# Altium PCB main.PcbDoc
Units mil, origin at the board's own origin, x right, y up, seen from the top; angles counter-clockwise.
Board outline 6000 x 4000 mil, 2 copper layers (Top Layer, Bottom Layer); 69 components, 52 nets, 285 pads, 20 vias.
Unrouted connection lines stored in the file: 158.
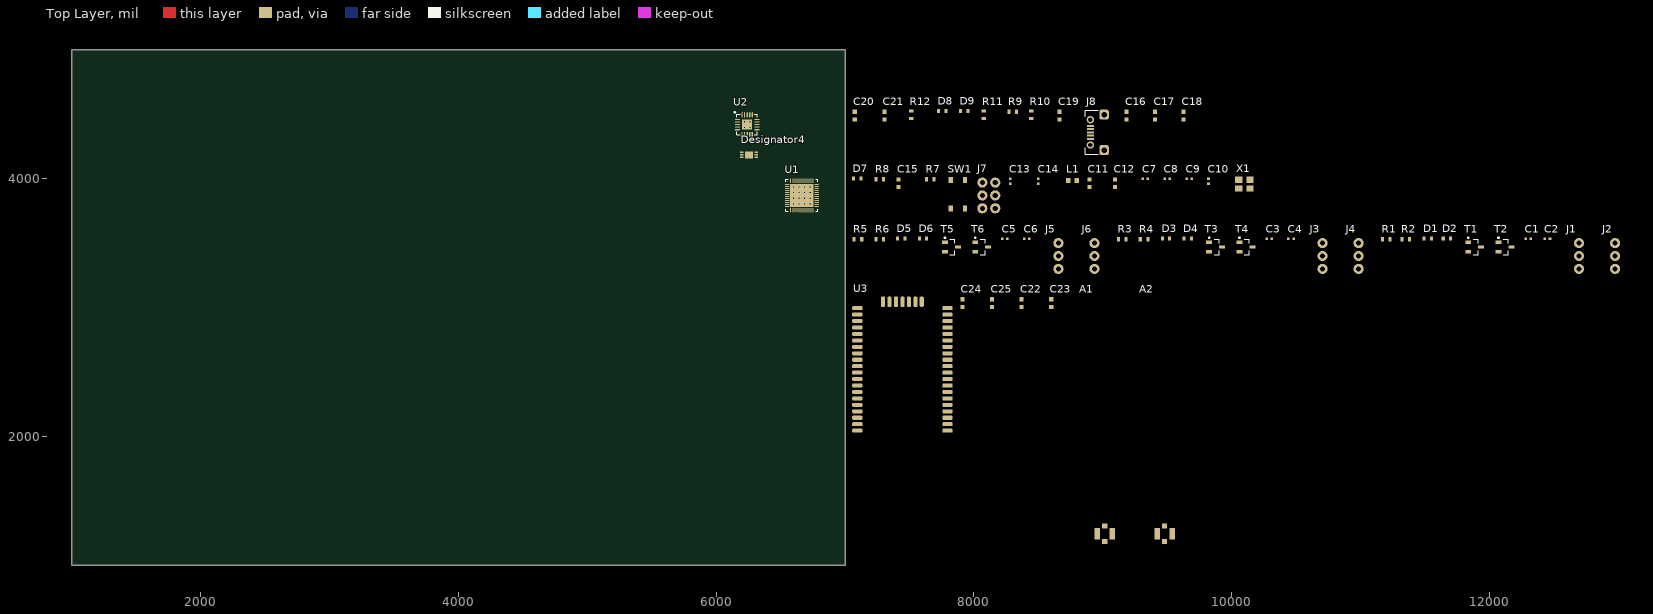
[diagram p0: Top Layer view]
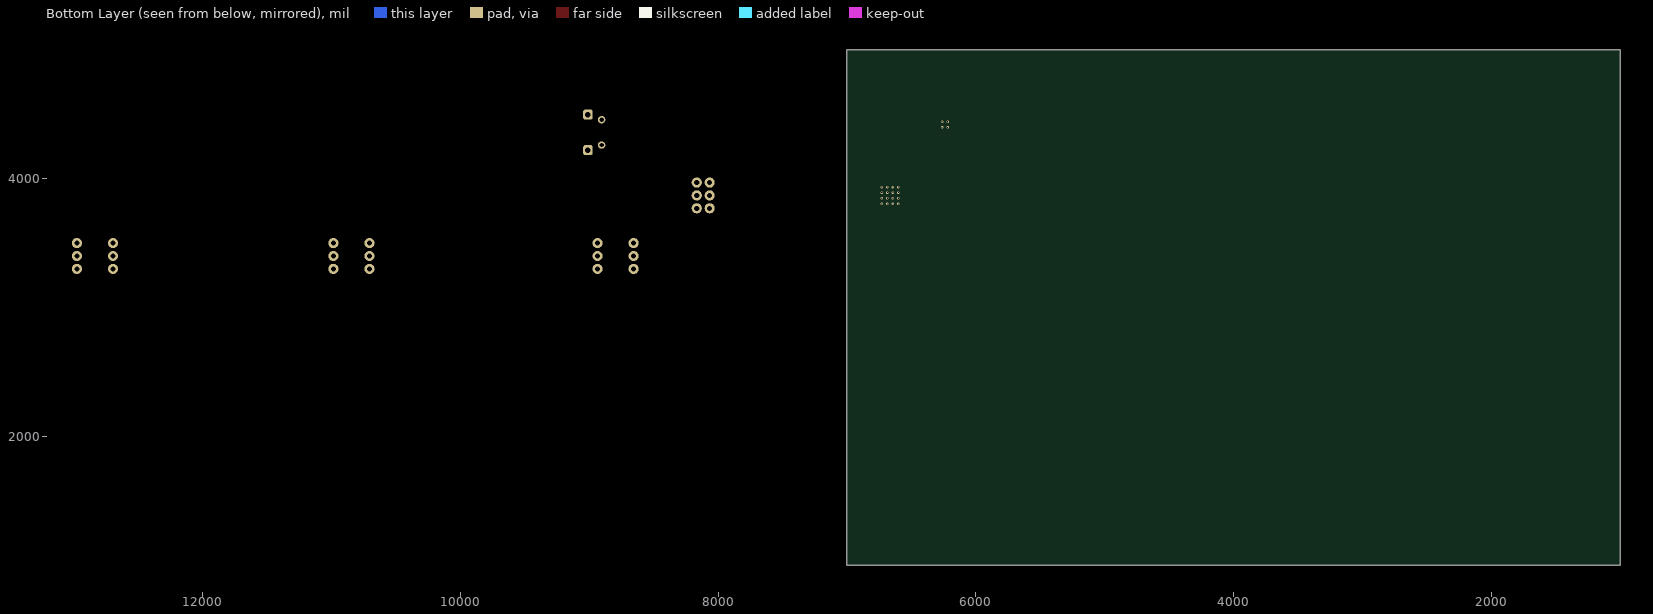
[diagram p1: Bottom Layer view, seen from below]

## Layer stack, top to bottom
Top Solder: solder mask 0.4, Solder Resist, Dk 3.5
Top Layer: signal copper 1.4
Dielectric 1: dielectric 12.6, FR-4, Dk 4.8
Bottom Layer: signal copper 1.4
Bottom Solder: solder mask 0.4, Solder Resist, Dk 3.5

## Board outline
1000,1000 7000,1000 7000,5000 1000,5000

## Design rules (kind name [scope] priority, off if disabled: settings)
Clearance [All] p1: gap=6.3 ignorepadtopadclearanceinfootprint=FALSE except(0: Arc-Text Arc-Hole Track-Text Track-Hole SMDPad-Text SMDPad-Hole THPad-Text THPad-Hole Via-Text Via-Hole Fill-Text Fill-Hole Poly-Text Poly-Hole Region-Text Region-Hole Text-Text Text-Hole)
Height [All] p1: minheight=0 maxheight=7874.02 prefheight=500
HoleSize [All] p1: absolutevalues=TRUE maxlimit=250 minlimit=11.81 maxpercent=80.000 minpercent=20.000
MinimumSolderMaskSliver [All] p1: minsoldermaskwidth=3.94
PlaneClearance [All] p1: clearance=39.37
PlaneConnect [All] p1: planeconnectstyle=Relief reliefexpansion=20 reliefentries=4 reliefconductorwidth=39.37 reliefairgap=10
PolygonConnect PolygonConnect_1 [IsVia] p1: connectstyle=Direct reliefconductorwidth=10 reliefentries=4 polygonreliefangle="90 Angle" airgapwidth=10
PolygonConnect [All] p2: connectstyle=Relief reliefconductorwidth=7.87 reliefentries=4 polygonreliefangle="90 Angle" airgapwidth=7.87
RoutingVias [All] p1: holewidth=11.81 width=23.62 viastyle="Through Hole" minholewidth=11.81 minwidth=23.62 maxholewidth=250 maxwidth=393.7
SilkToSolderMaskClearance [IsPad] p1: minsilkscreentomaskgap=7.01 clearancetoexposedcopper=TRUE
SolderMaskExpansion [All] p1: expansion=4
Width [All] p1: maxlimit=393.7 minlimit=6.3 preferedwidth=15.75
24 further rules are at their usual default settings.

## Classes and differential pairs
component class "USB HOST": C16 C17 C18 C19 C20 C21 D8 D9 J8 R9 R10 R11 R12 U2
component class "Target MCU": C7 C8 C9 C10 C11 C12 C13 C14 C15 D7 J7 L1 R7 R8 SW1 U1 X1
component class Sensors: C1 C2 C3 C4 C5 C6 D1 D2 D3 D4 D5 D6 J1 J2 J3 J4 J5 J6 R1 R2 R3 R4 R5 R6 T1 T2 T3 T4 T5 T6
component class LoRaWan: A1 A2 C22 C23 C24 C25 U3

## Components (designator, comment, footprint, x,y, rotation, side; value= is the part's Value field where it differs from the comment)
A1 "Antenna" "uFL SMD" 9015,1245 r0 top
A2 "Antenna" "uFL SMD" 9480,1245 r0 top
C1 "Capacitor 0402" C0402 12300,3535 r0 top value=100nF
C2 "Capacitor 0402" C0402 12450,3535 r0 top value=100nF
C3 "Capacitor 0402" C0402 10290,3535 r0 top value=100nF
C4 "Capacitor 0402" C0402 10460,3535 r0 top value=100nF
C5 "Capacitor 0402" C0402 8240,3535 r0 top value=100nF
C6 "Capacitor 0402" C0402 8410,3535 r0 top value=100nF
C7 "Capacitor 0402" C0402 9330,4000 r0 top value=100nF
C8 "Capacitor 0402" C0402 9500,4000 r0 top value=100nF
C9 "Capacitor 0402" C0402 9670,4000 r0 top value=100nF
C10 "Capacitor 0402" C0402 9820,3980 r90 top value=100nF
C11 "Capacitor 0603" C0603 8895,3965 r90 top value=100nF
C12 "Capacitor 0603" C0603 9095,3965 r90 top value=100nF
C13 "Capacitor 0402" C0402 8280,3980 r90 top value=100nF
C14 "Capacitor 0402" C0402 8500,3980 r90 top value=100pF
C15 "Capacitor 0603" C0603 7415,3965 r90 top value=100nF
C16 "Capacitor 0603" C0603 9185,4490 r90 top value=100nF
C17 "Capacitor 0603" C0603 9405,4490 r90 top value=100nF
C18 "Capacitor 0603" C0603 9625,4490 r90 top value=100nF
C19 "Capacitor 0603" C0603 8665,4490 r90 top value=100nF
C20 "Capacitor 0603" C0603 7075,4490 r90 top value=100nF
C21 "Capacitor 0603" C0603 7305,4490 r90 top value=100nF
C22 "Capacitor 0603" C0603 8370,3035 r90 top value=100nF
C23 "Capacitor 0603" C0603 8600,3035 r90 top value=100nF
C24 "Capacitor 0603" C0603 7910,3035 r90 top value=100nF
C25 "Capacitor 0603" C0603 8140,3035 r90 top value=100nF
D1 "LED Red" "L0603 RED" 11520,3535 r0 top
D2 "LED Red" "L0603 RED" 11670,3535 r0 top
D3 "LED Red" "L0603 RED" 9490,3535 r0 top
D4 "LED Red" "L0603 RED" 9660,3535 r0 top
D5 "LED Red" "L0603 RED" 7435,3535 r0 top
D6 "LED Red" "L0603 RED" 7605,3535 r0 top
D7 "LED Blue" "L0603 BLUE" 7095,4000 r0 top
D8 "LED Green" "L0603 GREEN" 7755,4525 r0 top
D9 "LED Green" "L0603 GREEN" 7925,4525 r0 top
Designator4 "Comment" "DFN 6-pins" 6255,4185 r90 top
J1 "Header 1x3" "Header 1x3 Male" 12695,3300 r0 top
J2 "Header 1x3" "Header 1x3 Male" 12975,3300 r0 top
J3 "Header 1x3" "Header 1x3 Male" 10705,3300 r0 top
J4 "Header 1x3" "Header 1x3 Male" 10985,3300 r0 top
J5 "Header 1x3" "Header 1x3 Male" 8655,3300 r0 top
J6 "Header 1x3" "Header 1x3 Male" 8935,3300 r0 top
J7 "Header 2x3" "Header 2x3 Male" 8065,3770 r0 top
J8 "USB micro" "USB micro" 8990,4360 r90 top
L1 "Inductor 0603" "Inductor 0603" 8765,3985 r0 top value=10mH
R1 "Resistor 0603" R0603 11200,3530 r0 top value=1k
R2 "Resistor 0603" R0603 11350,3530 r0 top value=1k
R3 "Resistor 0603" R0603 9150,3530 r0 top value=1k
R4 "Resistor 0603" R0603 9320,3530 r0 top value=1k
R5 "Resistor 0603" R0603 7100,3530 r0 top value=1k
R6 "Resistor 0603" R0603 7270,3530 r0 top value=1k
R7 "Resistor 0603" R0603 7660,3995 r0 top value=1k
R8 "Resistor 0603" R0603 7270,3995 r0 top value=1k
R9 "Resistor 0603" R0603 8300,4520 r0 top value=1k
R10 "Resistor 0603" R0603 8445,4495 r90 top value=1k
R11 "Resistor 0603" R0603 8075,4495 r90 top value=1k
R12 "Resistor 0603" R0603 7515,4495 r90 top value=1k
SW1 "Button" "Button SMD" 7875,3880 r0 top
T1 "N-CHANNEL MOSFET" 2N7002 11885,3470 r0 top
T2 "N-CHANNEL MOSFET" 2N7002 12120,3470 r0 top
T3 "N-CHANNEL MOSFET" 2N7002 9875,3470 r0 top
T4 "N-CHANNEL MOSFET" 2N7002 10110,3470 r0 top
T5 "N-CHANNEL MOSFET" 2N7002 7825,3470 r0 top
T6 "N-CHANNEL MOSFET" 2N7002 8060,3470 r0 top
U1 "ATmega4809" ATmega4809 6665,3870 r0 top
U2 "FT231" FTDI 6240,4420 r0 top
U3 "Wifi module" RN2483A 7095,2045 r0 top
X1 "Oscillator" "Crystal SMD 3.2x2.5" 10055,3925 r0 top

## Footprints (in the part's own frame and the unit in brackets; to place one, negate y for a bottom-side part, rotate by r counter-clockwise, add the part's x,y. Pads: shape width x height; smd on the part's side, far side on the other; paste and mask are expansions set on the pad)
2N7002 [mm] "N-CHANNEL MOSFET"
  rect 1.15x0.65 smd: 1(-1.275,0.95) 2(-1.275,-0.95) 3(1.275,0)
  silkscreen extent -1.4,-1.5 0.7,1.95, body extent -1.25,-1.5 1.25,1.5, height 1.2
ATmega4809 [mm] "QFN, 48-Leads, Body 6.00x6.00mm, Pitch 0.40mm, Thermal Pad 4.60x4.60mm, IPC Medium Density"
  oval 0.85x0.2 smd: 1(-2.9,2.2) 2(-2.9,1.8) 3(-2.9,1.4) 4(-2.9,1) 5(-2.9,0.6) 6(-2.9,0.2) 7(-2.9,-0.2) 8(-2.9,-0.6) 9(-2.9,-1) 10(-2.9,-1.4) 11(-2.9,-1.8) 12(-2.9,-2.2) 25(2.9,-2.2) 26(2.9,-1.8) 27(2.9,-1.4) 28(2.9,-1) 29(2.9,-0.6) 30(2.9,-0.2) 31(2.9,0.2) 32(2.9,0.6) 33(2.9,1) 34(2.9,1.4) 35(2.9,1.8) 36(2.9,2.2)
  oval 0.2x0.85 smd: 13(-2.2,-2.9) 14(-1.8,-2.9) 15(-1.4,-2.9) 16(-1,-2.9) 17(-0.6,-2.9) 18(-0.2,-2.9) 19(0.2,-2.9) 20(0.6,-2.9) 21(1,-2.9) 22(1.4,-2.9) 23(1.8,-2.9) 24(2.2,-2.9) 37(2.2,2.9) 38(1.8,2.9) 39(1.4,2.9) 40(1,2.9) 41(0.6,2.9) 42(0.2,2.9) 43(-0.2,2.9) 44(-0.6,2.9) 45(-1,2.9) 46(-1.4,2.9) 47(-1.8,2.9) 48(-2.2,2.9)
  rect 4.6x4.6 smd: 49(0,0)
  silkscreen extent -3.15,-3.15 3.15,3.15, body extent -3,-3 3,3, height 0.6
"Button SMD" [mm]
  rect 0.8x1.2 smd: 1(-1.4,2.794) 2(-1.4,-2.794) 3(1.4,2.794) 4(1.4,-2.794)
  body extent -2.29,-3.06 2.29,3.05, height 1.5
C0402 [mm]
  rect 0.5x0.5 smd: 1(-0.5,0) 2(0.5,0)
  body extent -0.5,-0.25 0.5,0.25, height 0.5
C0603 [mm]
  rect 0.8x0.8 smd: 1(-0.75,0) 2(0.75,0)
  body extent -0.8,-0.4 0.8,0.4, height 0.8
"Crystal SMD 3.2x2.5" [mm]
  rect 1.4x1.2 smd: 1(0,0) 2(2.2,0) 3(2.2,1.7) 4(0,1.7)
  body extent -0.5,-0.4 2.7,2.1, height 0.82
"DFN 6-pins" [mm]
  rect 0.25x0.7 smd: ""(-0.5,1.425) ""(-0.5,-1.425) ""(0,1.425) ""(0,-1.425) ""(0.5,1.425) ""(0.5,-1.425)
  rect 1.35x1.65 smd: ""(0,0)
  body extent -1.01,-1.49 0.99,1.51, height 0.8
FTDI [mm] "FT231XQ-R"
  oval 1x0.25 smd: 1(-1.925,1) 2(-1.925,0.5) 3(-1.925,0) 4(-1.925,-0.5) 5(-1.925,-1) 11(1.925,-1) 12(1.925,-0.5) 13(1.925,0) 14(1.925,0.5) 15(1.925,1)
  oval 0.25x1 smd: 6(-1,-1.925) 7(-0.5,-1.925) 8(0,-1.925) 9(0.5,-1.925) 10(1,-1.925) 16(1,1.925) 17(0.5,1.925) 18(0,1.925) 19(-0.5,1.925) 20(-1,1.925)
  rect 1.98x1.98 smd: 21(0,0)
  silkscreen extent -2.54,-2 2,2.54, body extent -2,-2 2,2, height 0.8
"Header 1x3 Male" [mm]
  round 2 hole 1: 1(0,0) 2(0,2.54) 3(0,5.08)
  body extent -2.79,-1.27 3.05,6.35, height 11.7
"Header 2x3 Male" [mm]
  round 2 hole 1: 1(0,0) 2(2.54,0) 3(0,2.54) 4(2.54,2.54) 5(0,5.08) 6(2.54,5.08)
  body extent -1.27,-1.27 3.81,6.35, height 8.38
"Inductor 0603" [mm]
  rect 0.88x0.99 smd: 1(-0.815,0) 2(0.815,0)
  body extent -0.87,-0.48 0.87,0.48, height 0.91
"L0603 BLUE" [mm]
  rect 0.6x0.8 smd: 1(-0.725,0) 2(0.725,0)
  body extent -0.8,-0.4 0.8,0.4, height 0.6
"L0603 GREEN" [mm]
  rect 0.6x0.8 smd: 1(-0.725,0) 2(0.725,0)
  body extent -0.8,-0.4 0.8,0.4, height 0.6
"L0603 RED" [mm]
  rect 0.6x0.8 smd: 1(-0.725,0) 2(0.725,0)
  body extent -0.8,-0.4 0.8,0.4, height 0.6
R0603 [mm]
  rect 0.6x0.9 smd: 1(-0.75,0) 2(0.75,0)
  body extent -0.8,-0.45 0.8,0.45, height 0.5
RN2483A [mm] "RN2483A"
  rrect50% 2x0.8 smd: 1(17.78,0) 2(17.78,1.27) 3(17.78,2.54) 4(17.78,3.81) 5(17.78,5.08) 6(17.78,6.35) 7(17.78,7.62) 8(17.78,8.89) 9(17.78,10.16) 10(17.78,11.43) 11(17.78,12.7) 12(17.78,13.97) 13(17.78,15.24) 14(17.78,16.51) 15(17.78,17.78) 16(17.78,19.05) 17(17.78,20.32) 18(17.78,21.59) 19(17.78,22.86) 20(17.78,24.13) 28(0,24.13) 29(0,22.86) 30(0,21.59) 31(0,20.32) 32(0,19.05) 33(0,17.78) 34(0,16.51) 35(0,15.24) 36(0,13.97) 37(0,12.7) 38(0,11.43) 39(0,10.16) 40(0,8.89) 41(0,7.62) 42(0,6.35) 43(0,5.08) 44(0,3.81) 45(0,2.54) 46(0,1.27) 47(0,0)
  rrect50% 0.8x2 smd: 21(12.7,25.4) 22(11.43,25.4) 23(10.16,25.4) 24(8.89,25.4) 25(7.62,25.4) 26(6.35,25.4) 27(5.08,25.4)
  body extent -0.02,-1.27 17.78,25.4, height 3.01
"uFL SMD" [mm] "Antenna connector"
  rect 1x1 smd: 1(0,-1.5) 2(0,1.5)
  rect 1.05x2.2 smd: 2(-1.475,0) 2(1.475,0)
  body extent -5.25,-4.61 5.25,46.75, height 20
"USB micro" [mm]
  rrect50% 2x1.9 hole 1.1 unplated: 0(-3.517,-0.5) 0(3.483,-0.5)
  round 1.45 hole 0.85 unplated: 0(-2.517,2.2) 0(2.483,2.2)
  rect 0.4x1.35 smd: 1(-1.317,2.2) 2(-0.667,2.2) 3(-0.017,2.2) 4(0.633,2.2) 5(1.283,2.2)
  silkscreen extent -4.32,0.63 4.32,3.18, body extent -4.1,-3.03 4.1,2.4, height 0.23

## Part data
A1 A2: library part "uFL SMD"
D1 D2 D3 D4 D5 D6: library part "LED 0603 Red"
D7: library part "LED 0603 Blue"
D8 D9: library part "LED 0603 Green"
J1 J2 J3 J4 J5 J6: library part "Header 1x3 Male"
J7: library part "Header  2x3 Male"
SW1: library part "Button SMD"
T1 T2 T3 T4 T5 T6: library part 2N7002
U2: library part FTDI, "USB to UART"
U3: library part "LoRaWan module", "RN2483A"
X1: library part "Oscillator 3.2x2.5mm"

## Via types
v1: diameter 19.68, hole 7.87, Top Layer to Bottom Layer, 20 vias

## Nets (pads, with @x,y where several pads share a name; then routed paths per layer and width w, separated by ;. In a path a pad name is that pad's centre, name@x,y a point inside that pad or via, vN(x,y) a via of type N, cw(c..) or ccw(c..) an arc to the next point about the centre after c; other vN are vias at no path point)
+3V3: C7.2 C8.2 C9.2 C10.2 C11.2 J1.1 J2.1 J3.1 J4.1 J5.1 J6.1 J7.6 L1.1 U1.14 U1.42 X1.4
ADC_SENSOR1: C1.2 J1.2 U1.20
ADC_SENSOR2: C2.2 J2.2 U1.21
ADC_SENSOR3: C3.2 J3.2 U1.22
ADC_SENSOR4: C4.2 J4.2 U1.23
ADC_SENSOR5: C5.2 J5.2 U1.24
ADC_SENSOR6: C6.2 J6.2 U1.25
BUTTON: R7.1 U1.46
GND: A1.2 A2.2 C1.1 C2.1 C3.1 C4.1 C5.1 C6.1 C7.1 C8.1 C9.1 C10.1 C11.1 C12.1 C13.1 C14.1 C15.1 C16.1 C17.1 C18.1 C19.1 C20.1 C21.1 C22.1 C23.1 C24.1 C25.1 D7.2 J7.2 R1.1 R2.1 R3.1 R4.1 R5.1 R6.1 SW1.3 SW1.4 T1.2 T2.2 T3.2 T4.2 T5.2 T6.2 U1.15 U1.29 U1.43 U2.3 U2.13 U3.1 U3.8 U3.11 U3.20 U3.21 U3.22 U3.24 U3.26 U3.27 U3.28 U3.33 U3.41 U3.47 X1.2
LED: R8.1 U1.47
NetA1_1: A1.1 U3.25
NetA2_1: A2.1 U3.23
NetC13_2: C13.2 C14.2 L1.2 U1.28
NetC15_2: C15.2 R7.2 SW1.1 SW1.2
NetC19_2: C19.2 U2.10 U2.11 U2.20
NetC20_2: C20.2 J8.2 R11.1
NetC21_2: C21.2 J8.3 R12.1
NetC22_2: C22.2 C23.2 U3.34
NetC24_2: C24.2 C25.2 U3.12
NetD1_2: D1.2 R1.2
NetD2_2: D2.2 R2.2
NetD3_2: D3.2 R3.2
NetD4_2: D4.2 R4.2
NetD5_2: D5.2 R5.2
NetD6_2: D6.2 R6.2
NetD7_1: D7.1 R8.2
NetD8_1: D8.1 R9.1
NetD8_2: D8.2 U2.14
NetD9_1: D9.1 R10.1
NetD9_2: D9.2 U2.7
NetJ1_3: J1.3 T1.3
NetJ2_3: J2.3 T2.3
NetJ3_3: J3.3 T3.3
NetJ4_3: J4.3 T4.3
NetJ5_3: J5.3 T5.3
NetJ6_3: J6.3 T6.3
NetR11_2: R11.2 U2.9
NetR12_2: R12.2 U2.8
NetU1_1: U1.1 U2.17
NetU1_10: U1.10 U3.7
NetU1_11: U1.11 U3.6
NetU1_48: U1.48 U2.1
OSC_EN: U1.45 X1.1
OSC_IN: C12.2 U1.44 X1.3
SW_SENSOR1: D1.1 T1.1 U1.4
SW_SENSOR2: D2.1 T2.1 U1.5
SW_SENSOR3: D3.1 T3.1 U1.6
SW_SENSOR4: D4.1 T4.1 U1.7
SW_SENSOR5: D5.1 T5.1 U1.8
SW_SENSOR6: D6.1 T6.1 U1.9
UPDI: J7.3 U1.41
USB_VCC: C16.2 C17.2 C18.2 J8.1 R9.2 R10.2 U2.12
pads on no net: Designator4. J7.1 J7.4 J7.5 J8.0 J8.4 J8.5 U1.2 U1.3 U1.12 U1.13 U1.16 U1.17 U1.18 U1.19 U1.26 U1.27 U1.30 U1.31 U1.32 U1.33 U1.34 U1.35 U1.36 U1.37 U1.38 U1.39 U1.40 U1.49 U2.2 U2.4 U2.5 U2.6 U2.15 U2.16 U2.18 U2.19 U2.21 U3.2 U3.3 U3.4 U3.5 U3.9 U3.10 U3.13 U3.14 U3.15 U3.16 U3.17 U3.18 U3.19 U3.29 U3.30 U3.31 U3.32 U3.35 U3.36 U3.37 U3.38 U3.39 U3.40 U3.42 U3.43 U3.44 U3.45 U3.46
copper on no net:
  other v1: 6600.04,3805.04 6643.35,3805.04 6686.65,3805.04 6729.96,3805.04 6600.04,3848.35 6643.35,3848.35 6686.65,3848.35 6729.96,3848.35 6600.04,3891.65 6643.35,3891.65 6686.65,3891.65 6729.96,3891.65 6600.04,3934.96 6643.35,3934.96 6686.65,3934.96 6729.96,3934.96 6218.35,4398.35 6261.65,4398.35 6218.35,4441.65 6261.65,4441.65